# EAGLE board BusPirate-24Fv0a (EAGLE 5.02)
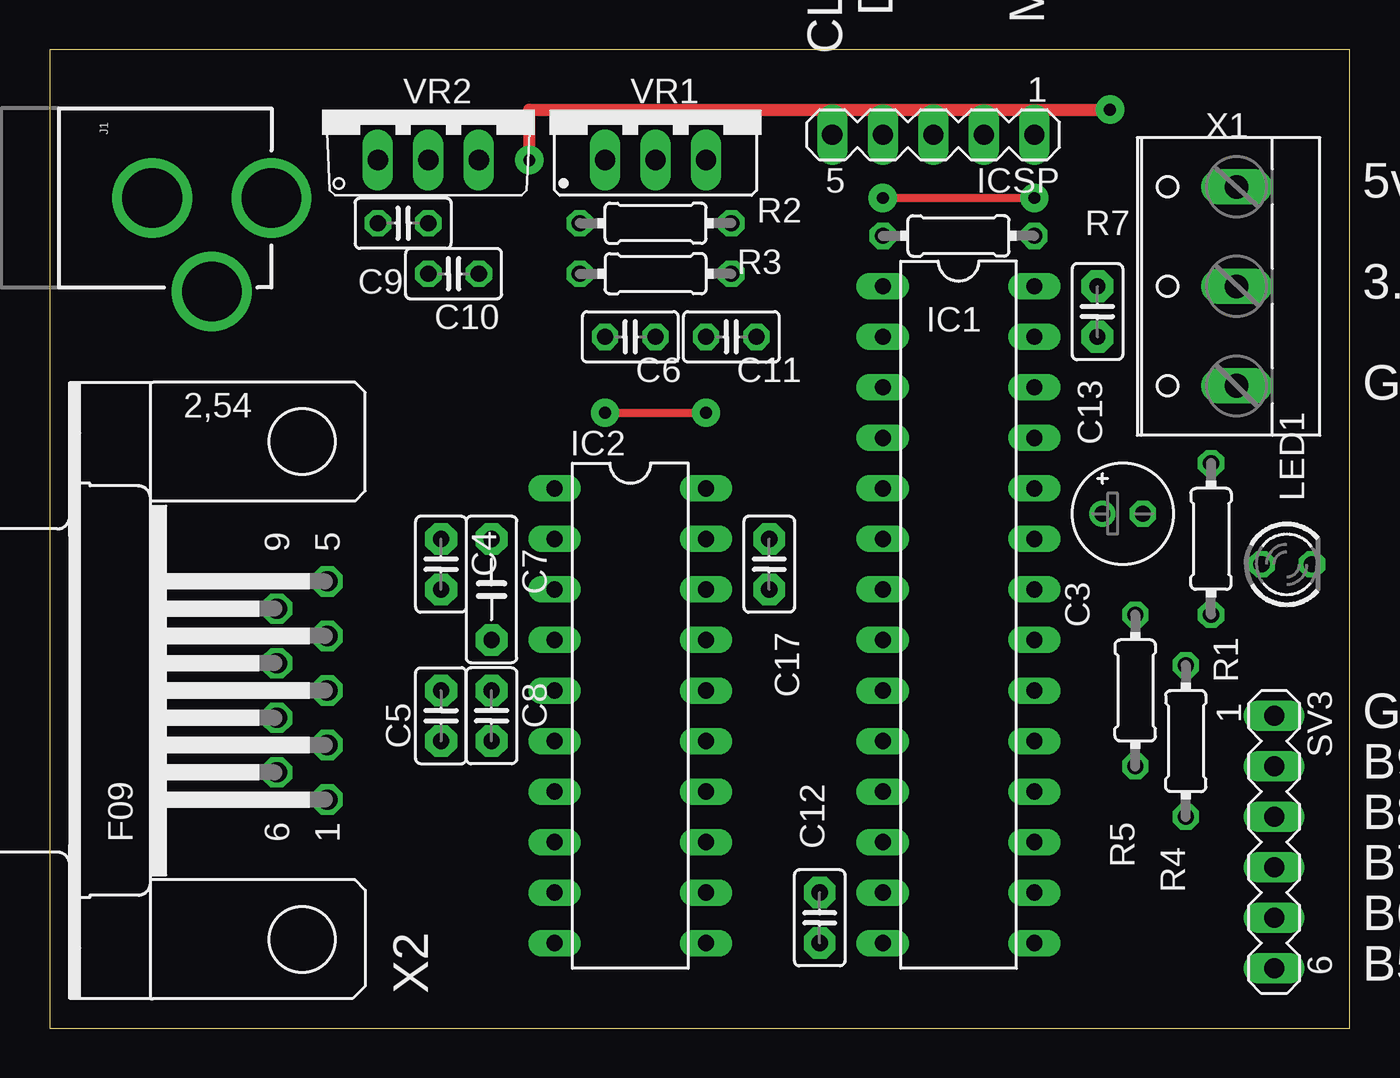
[diagram p0: board, top side]
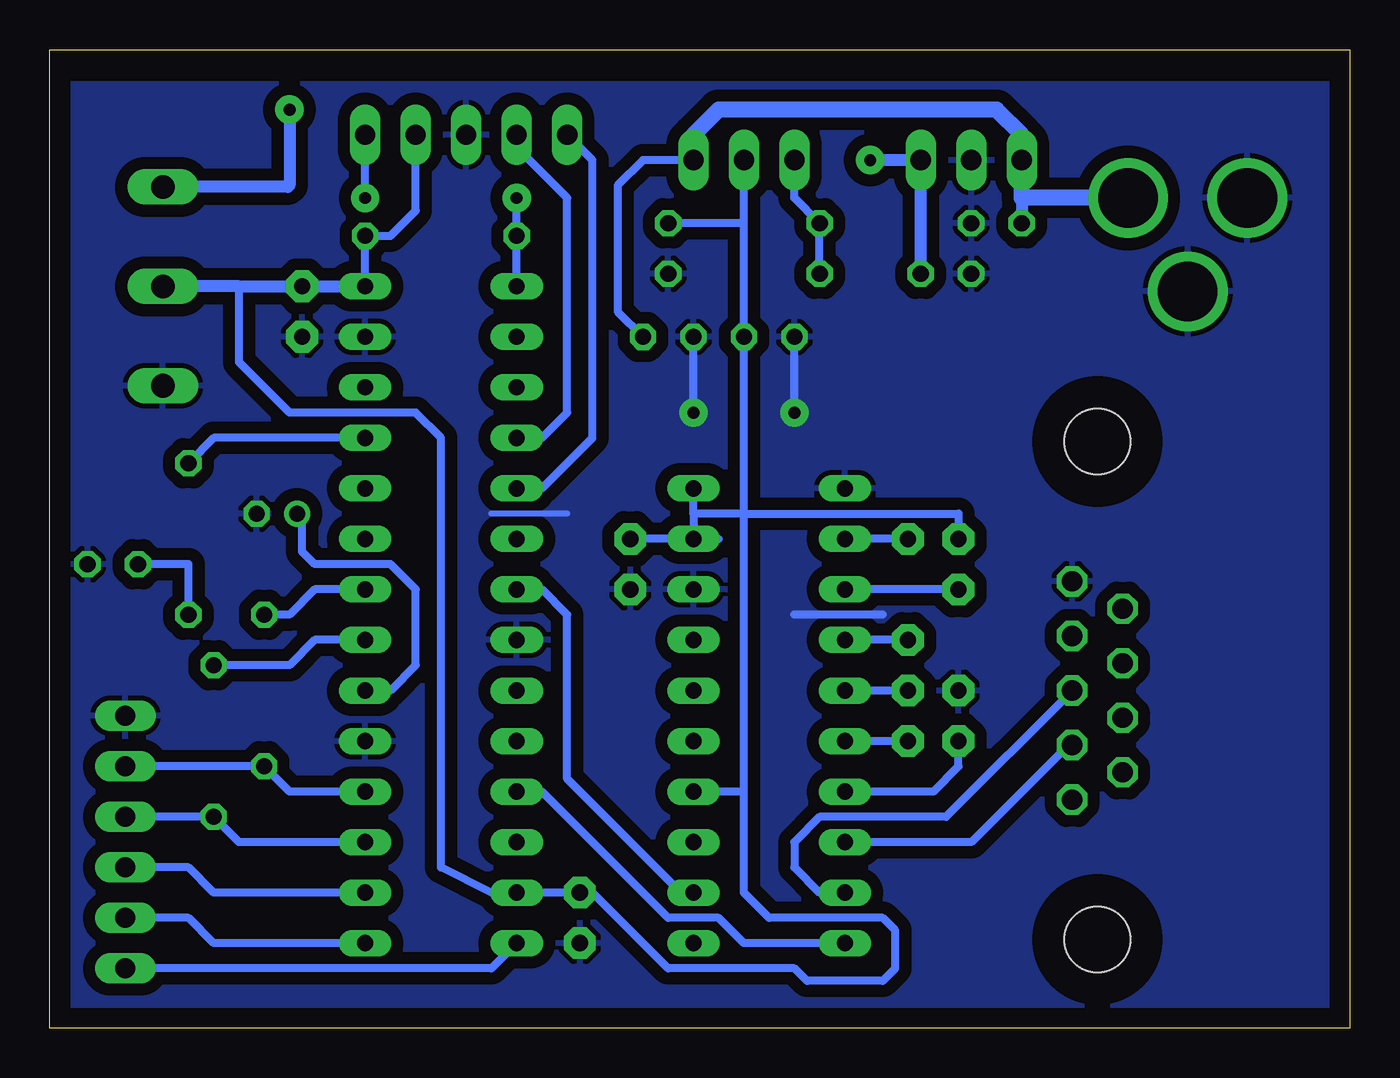
[diagram p1: board, bottom side, seen from below]

Size 65.39 x 49.2 mm. Coordinates in mm from the lower left corner, seen from the top.
Outline: 65.39,0 65.39,49.2 0,49.2 0,0 65.39,0
Copper layers (1*16): Top 0.035mm / dielectric 1.5mm / Bottom 0.035mm
Design rules "10mils": minimum track width 10mil, minimum drill 24mil, track to track 10mil, track to pad 10mil, pad to pad 10mil, via to via 10mil, smd to smd 10mil, copper to edge 40mil, drill to drill 10mil, minimum pad ring 10mil, minimum via ring 8mil, stop-mask expansion 0mil, vias tented up to drill 0mil, thermal gap 10mil

## Footprints (pad centres in the part's own frame; a part is rotated, then mirrored left to right if it is on the bottom)
E2-5 = drill 0.813 pad 1.27 round: + -1.016,0 | drill 0.813 pad 1.27 octagon: - 1.016,0
C2.5-2 = drill 0.813 pad 1.6 octagon: 1 -1.27,0; 2 1.27,0
C025-025X050 = drill 0.813 octagon: 1 -1.27,0; 2 1.27,0
C5B2.5 = drill 0.813 pad 1.6 octagon: 1 -2.54,0; 2 2.54,0
DIL28-3 = drill 0.813 long: 1 -16.51,-3.81; 2 -13.97,-3.81; 3 -11.43,-3.81; 4 -8.89,-3.81; 5 -6.35,-3.81; 6 -3.81,-3.81; 7 -1.27,-3.81; 8 1.27,-3.81; 9 3.81,-3.81; 10 6.35,-3.81; 11 8.89,-3.81; 12 11.43,-3.81; 13 13.97,-3.81; 14 16.51,-3.81; 15 16.51,3.81; 16 13.97,3.81; 17 11.43,3.81; 18 8.89,3.81; 19 6.35,3.81; 20 3.81,3.81; 21 1.27,3.81; 22 -1.27,3.81; 23 -3.81,3.81; 24 -6.35,3.81; 25 -8.89,3.81; 26 -11.43,3.81; 27 -13.97,3.81; 28 -16.51,3.81
DIL20 = drill 0.813 long: 1 -11.43,-3.81; 2 -8.89,-3.81; 3 -6.35,-3.81; 4 -3.81,-3.81; 5 -1.27,-3.81; 6 1.27,-3.81; 7 3.81,-3.81; 8 6.35,-3.81; 9 8.89,-3.81; 10 11.43,-3.81; 11 11.43,3.81; 12 8.89,3.81; 13 6.35,3.81; 14 3.81,3.81; 15 1.27,3.81; 16 -1.27,3.81; 17 -3.81,3.81; 18 -6.35,3.81; 19 -8.89,3.81; 20 -11.43,3.81
MA05-1 = drill 1.016 long: 1 -5.08,0; 2 -2.54,0; 3 0,0; 4 2.54,0; 5 5.08,0
POWER_JACK_PTH = drill 2.997 round: GND 0,7.7; GNDBREAK 4.7,10.7; PWR 0,13.7
LED3MM = drill 0.813 octagon: A -1.27,0; K 1.27,0
0204/7 = drill 0.813 octagon: 1 -3.81,0; 2 3.81,0
MA06-1 = drill 1.016 long: 1 -6.35,0; 2 -3.81,0; 3 -1.27,0; 4 1.27,0; 5 3.81,0; 6 6.35,0
317TS = drill 1.016 long: 1 -2.54,-2.54; 2 0,-2.54; 3 2.54,-2.54
TO220V = drill 1.016 long: 1 -2.54,-2.54; 2 0,-2.54; 3 2.54,-2.54
W237-103 = drill 1.194 long: 1 -5,-1.29; 2 0,-1.29; 3 5,-1.29
F09H = drill 1.016 octagon: 1 -5.486,-1.27; 2 -2.743,-1.27; 3 0,-1.27; 4 2.743,-1.27; 5 5.486,-1.27; 6 -4.115,1.27; 7 -1.372,1.27; 8 1.372,1.27; 9 4.115,1.27 | hole 3.302: -12.522,0; 12.522,0

## Placement (x,y rotation side)
C3  10uF  [E2-5]  53.97,25.87 0 top
C4  0.1uF  [C2.5-2]  19.68,23.33 270 top
C5  0.1uF  [C2.5-2]  19.68,15.71 90 top
C6  0.1uf  [C025-025X050]  29.21,34.76 180 top
C7  0.1uF  [C5B2.5]  22.22,22.06 270 top
C8  0.1uF  [C2.5-2]  22.22,15.71 270 top
C9  0.1uf  [C025-025X050]  17.78,40.48 0 top
C10  0.1uf  [C025-025X050]  20.32,37.94 180 top
C11  0.1uf  [C025-025X050]  34.29,34.76 180 top
C12  0.1uF  [C2.5-2]  38.73,5.55 270 top
C13  0.1uF  [C2.5-2]  52.7,36.03 270 top
C17  0.1uF  [C2.5-2]  36.19,23.33 270 top
IC1  PIC24FJ64GA002-DIP  [DIL28-3]  45.72,20.79 270 top
IC2  MAX3223CPP  [DIL20]  29.21,15.71 270 top
ICSP  [MA05-1]  44.45,44.92 180 top
J1  POWER_JACKPTH  [POWER_JACK_PTH]  -2.54,41.75 270 top
LED1  [LED3MM]  62.23,23.33 0 top
R1  330R  [0204/7]  58.41,24.6 90 top
R2  240R  [0204/7]  30.48,40.48 0 top
R3  390R  [0204/7]  30.48,37.94 180 top
R4  2k2  [0204/7]  57.15,14.44 90 top
R5  2k2  [0204/7]  54.61,16.98 90 top
R7  2K  [0204/7]  45.72,39.84 0 top
SV3  [MA06-1]  61.59,9.36 270 top
VR1  [317TS]  30.48,46.19 0 top
VR2  7805TV  [TO220V]  19.05,46.19 0 top
X1  [W237-103]  58.41,37.3 90 top
X2  [F09H]  12.7,16.98 90 top

## Library data of the parts
C3 C6 C9-C11 R1-R5 R7 = rcl
C4 C5 C7 C8 C12 C13 C17 = capacitor-wima
IC1 = microchip-pic24
IC2 = maxim
ICSP SV3 = con-lstb
J1 = SparkFun
LED1 = led
VR1 = v-reg
VR2 = linear
X1 = con-wago-500
X2 = con-subd

## Nets
AUX: IC1.14 SV3.6
CS/TX: IC1.15 SV3.5
GND: C3.- C5.2 C6.2 C9.2 C10.2 C11.2 C12.2 C13.2 C17.2 IC1.8 IC1.19 IC1.27 IC2.1 IC2.18 ICSP.3 J1.GND J1.GNDBREAK LED1.K R3.1 SV3.1 VR2.2 X1.1 X2.5
MCLR: IC1.1 ICSP.1 R7.1
MISO/RX: IC1.16 SV3.4
N$1: IC1.21 R4.2
N$2: IC1.22 R5.2
N$3: C3.+ IC1.20
N$4: IC1.25 R1.2
N$5: IC2.9 X2.3
N$6: C10.1 VR2.3 X1.3
N$7: LED1.A R1.1
N$9: C9.1 C11.1 J1.PWR VR1.3 VR2.1
N$10: C4.2 IC2.3
N$11: C5.1 IC2.7
N$13: IC2.8 X2.2
N$14: C7.2 IC2.4
N$15: C7.1 IC2.2
N$16: C8.1 IC2.5
N$17: C8.2 IC2.6
N$18: R2.1 R3.2 VR1.1
N$19: IC1.6
PGC: IC1.5 ICSP.5
PGD: IC1.4 ICSP.4
RX: IC1.11 IC2.10
SCL/CLK: IC1.17 R4.1 SV3.3
SDA/MOSI: IC1.18 R5.1 SV3.2
TX: IC1.7 IC2.12
VCC: C4.1 C6.1 C12.1 C13.1 C17.1 IC1.13 IC1.28 IC2.14 IC2.19 IC2.20 ICSP.2 R2.2 R7.2 VR1.2 X1.2

## Tracks (layer width: path | path; a pad name or v marks a point on that pad's centre or on a via)
AUX
  Bottom 0.406: IC1.14 43.18,3.01 SV3.6
CS/TX
  Bottom 0.406: IC1.15 57.15,4.28 58.41,5.55 SV3.5
GND  (via drill 0.6 pad 1.42)
  Top 0.406: v27.94,30.95 v33.02,30.95
  Bottom 0.305: 39.37,25.87 43.18,25.87
  Bottom 0.406: 23.49,20.79 27.94,20.79 | v27.94,30.95 C6.2 | v33.02,30.95 C11.2
  pour Bottom (isolate 0.61): 0,0.47 0,47.46 64.77,47.46 64.77,0.47
MCLR  (via drill 0.6 pad 1.42)
  Top 0.406: v41.91,41.75 v49.52,41.75
  Bottom 0.406: IC1.1 R7.1 v41.91,41.75 | v49.52,41.75 ICSP.1
MISO/RX
  Bottom 0.406: IC1.16 57.15,6.82 58.41,8.09 SV3.4
N$1
  Bottom 0.406: R4.2 53.34,18.25 52.07,19.52 IC1.21
N$2
  Bottom 0.406: R5.2 53.34,20.79 52.07,22.06 IC1.22
N$3
  Bottom 0.406: IC1.20 48.26,16.98 46.98,18.25 46.98,22.06 48.26,23.33 52.07,23.33 52.7,23.96 52.7,25.87 C3.+
N$4
  Bottom 0.406: R1.2 57.15,29.68 IC1.25
N$5
  Bottom 0.406: X2.3 20.32,10.63 26.67,10.63 27.94,9.36 27.94,8.09 26.67,6.82 IC2.9
N$6  (via drill 0.6 pad 1.42)
  Top 0.61: v24.12,43.65 24.12,46.19 v53.34,46.19
  Bottom 0.406: 53.34,42.38 53.41,42.3
  Bottom 0.61: 53.41,42.3 X1.3 | v53.34,46.19 53.34,42.38 | C10.1 VR2.3 v24.12,43.65
N$7
  Bottom 0.406: R1.1 58.41,23.33 LED1.A
N$9
  Bottom 0.406: C11.1 36.83,36.03 36.83,42.38 35.55,43.65 VR1.3
  Bottom 0.61: 16.51,41.75 C9.1
  Bottom 0.813: J1.PWR 16.51,41.75 VR2.1 16.51,44.92 17.78,46.19 31.75,46.19 33.02,44.92 VR1.3
N$10
  Bottom 0.406: C4.2 IC2.3
N$11
  Bottom 0.406: C5.1 19.68,13.17 20.95,11.9 IC2.7
N$13
  Bottom 0.406: X2.2 13.96,14.44 19.05,9.36 IC2.8
N$14
  Bottom 0.406: C7.2 IC2.4
N$15
  Bottom 0.406: C7.1 IC2.2
N$16
  Bottom 0.406: C8.1 IC2.5
N$17
  Bottom 0.406: C8.2 IC2.6
N$18
  Bottom 0.406: R3.2 R2.1 27.94,41.75 VR1.1
PGC
  Bottom 0.406: IC1.5 40.63,27.14 38.09,29.68 38.09,43.65 ICSP.5
PGD
  Bottom 0.406: ICSP.4 41.91,44.29 39.37,41.75 39.37,30.95 40.63,29.68 IC1.4
RX
  Bottom 0.406: IC2.10 30.48,4.28 31.75,5.55 34.29,5.55 40.63,11.9 IC1.11
SCL/CLK
  Bottom 0.406: SV3.3 R4.1 55.88,9.36 IC1.17
SDA/MOSI
  Bottom 0.406: IC1.18 53.34,11.9 R5.1 SV3.2
TX
  Bottom 0.406: IC2.12 33.65,6.82 39.37,12.54 39.37,20.79 40.63,22.06 IC1.7
VCC
  Bottom 0.305: 38.09,6.82 C12.1
  Bottom 0.406: IC1.28 R7.2 48.26,39.84 46.98,41.11 ICSP.2 | IC2.19 C17.1 IC2.19 | C12.1 IC1.13 43.18,6.82 45.72,8.09 45.72,29.68 46.98,30.95 53.34,30.95 55.88,33.49 55.88,37.3 | 30.48,40.48 C6.1 30.48,25.87 | 30.48,40.48 VR1.2 | 30.48,40.48 R2.2 | C13.1 53.34,37.3 | 33.02,25.87 IC2.19 | C4.1 19.68,25.87 30.48,25.87 | 30.48,11.9 IC2.14 | 30.48,11.9 30.48,6.82 29.21,5.55 23.49,5.55 22.86,4.92 22.86,3.01 23.49,2.38 27.3,2.38 27.94,3.01 34.29,3.01 38.09,6.82 | IC2.19 31.75,24.6 | 30.48,11.9 30.48,25.87 | 33.02,25.87 IC2.20 | 30.48,25.87 33.02,25.87
  Bottom 0.61: IC1.28 C13.1 55.88,37.3 X1.2

## Text on the board
tNames: Programming Header | CLOCK | DATA | GND | +5V | MCLR | 5volts | 3.3volts | GND | 14V-20V DC Supply Connection | GND | B9/MOSI/SDA | B8/CLK/SCL | B7/MISO/RX | B6/CS/TX | B5/AUX IO